# Altium PCB 256ch Headstage PCB_TY.PcbDoc (part 1 of 2)
Units mm, origin at the board's own origin, x right, y up, seen from the top; angles counter-clockwise.
Board outline 24.93 x 25 mm, 4 copper layers (Top Layer, Signal Layer 1, Signal Layer 2, Bottom Layer), stack 0.778 mm thick; 20 components, 288 nets, 788 pads, 303 vias.
Unrouted connection lines stored in the file: 4.
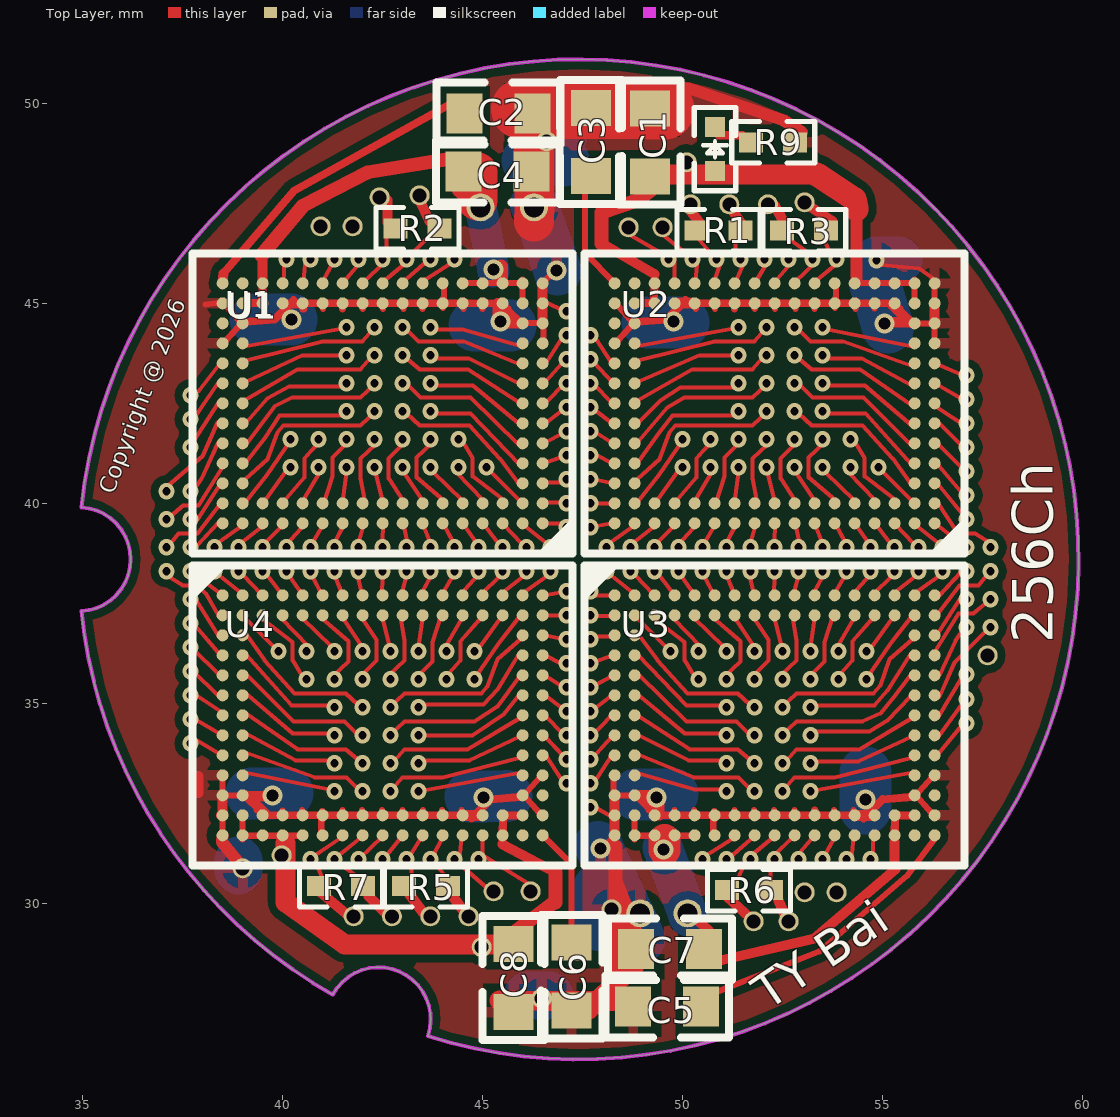
[diagram p0: Top Layer view]
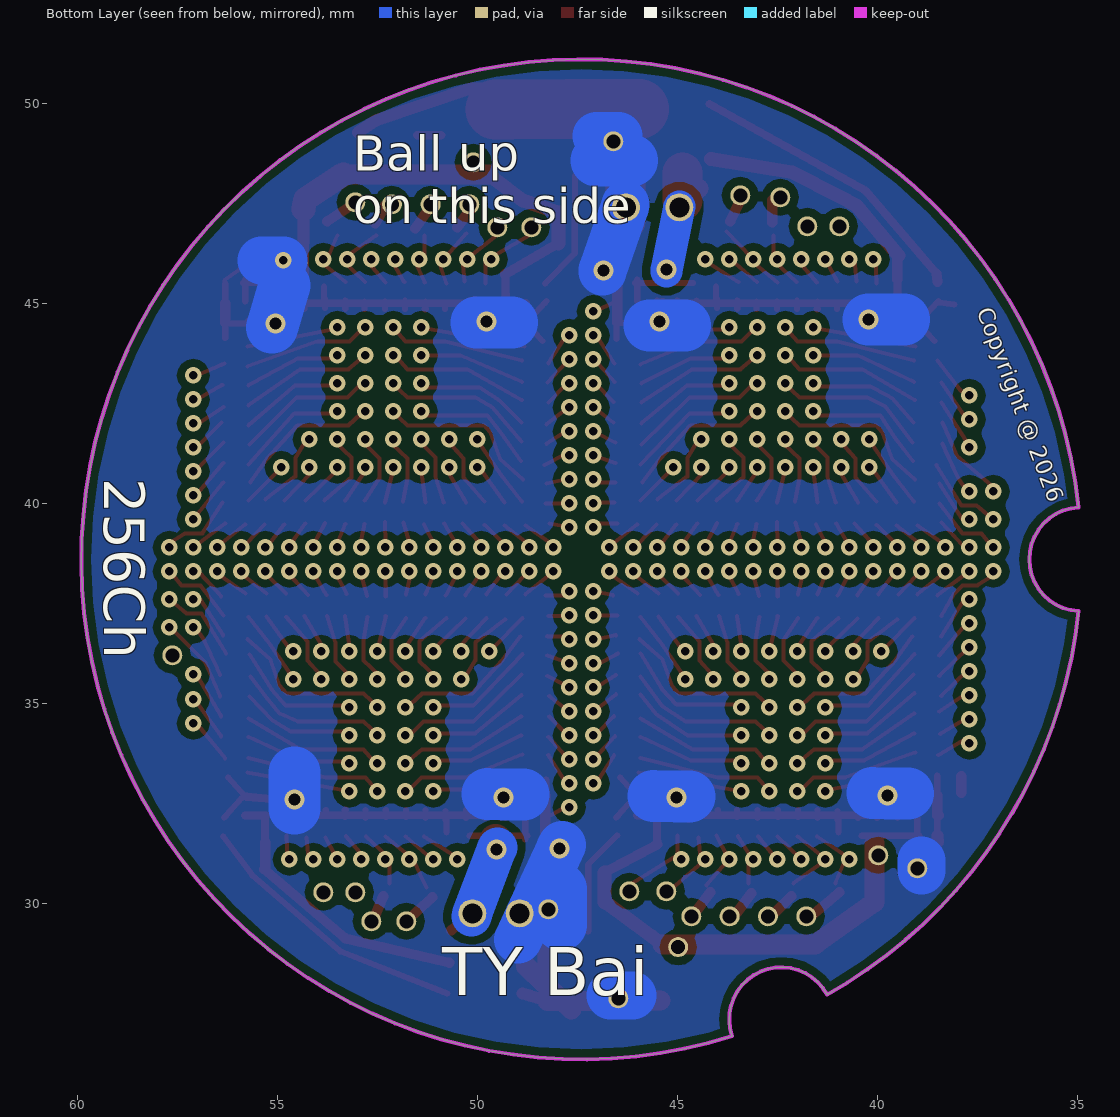
[diagram p1: Bottom Layer view, seen from below]
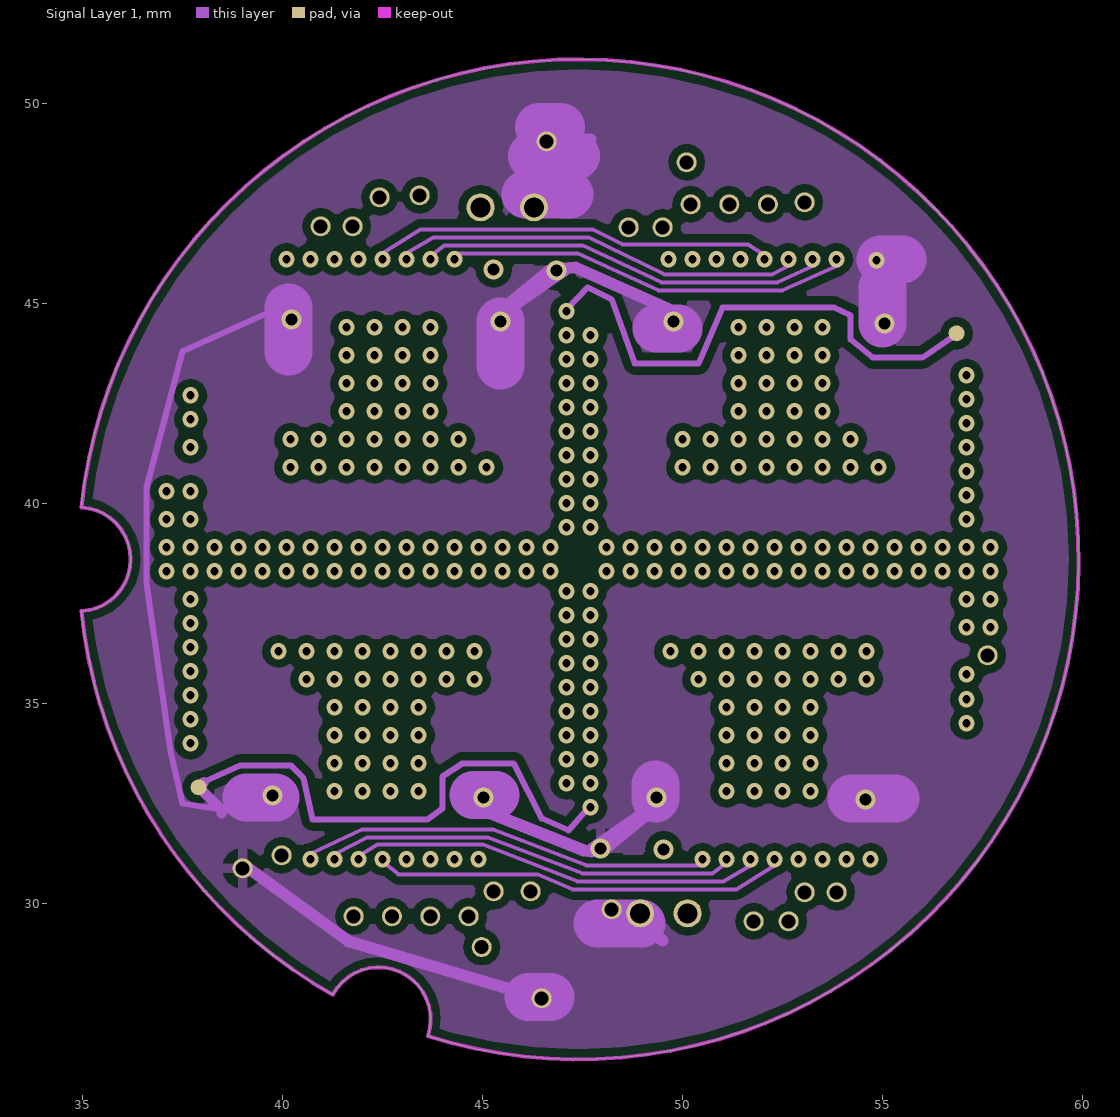
[diagram p2: Signal Layer 1]
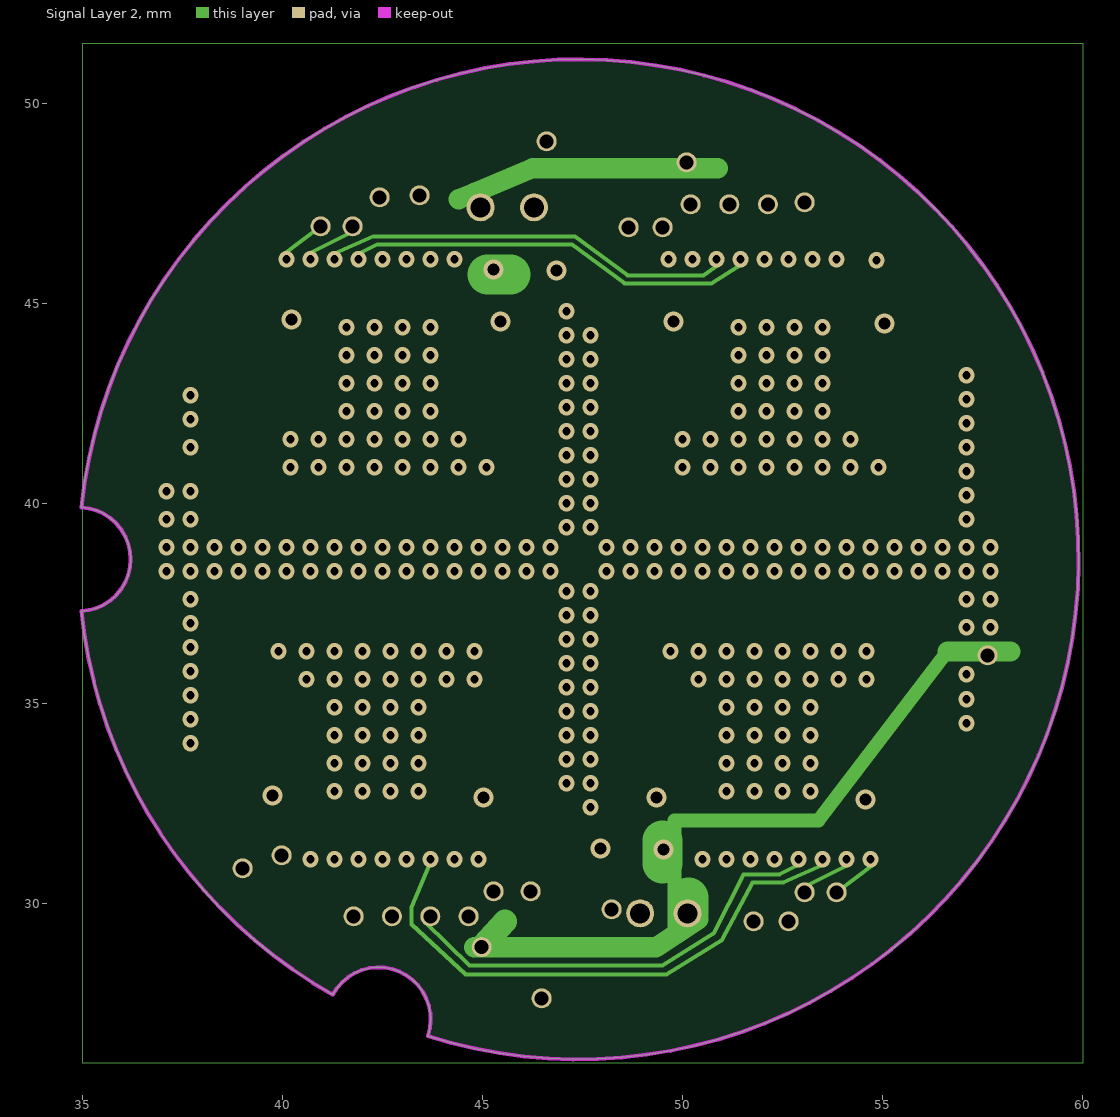
[diagram p3: Signal Layer 2]

## Layer stack, top to bottom
Top Solder: solder mask 0.0102, Solder Resist, Dk 3.5
Top Layer: signal copper 0.0356
Dielectric 1: core 0.254, FR-4, Dk 4.2
Signal Layer 1: signal copper 0.036
Dielectric 3: prepreg 0.127, Dk 4.2
Signal Layer 2: signal copper 0.036
Dielectric 4: core 0.254, Dk 4.2
Bottom Layer: signal copper 0.0356
Bottom Solder: solder mask 0.0102, Solder Resist, Dk 3.5

## Board outline
43.631,26.682 ccw(c47.4,38.6) 34.967,39.897 34.968,39.898 cw(c34.9,38.6) 34.968,37.302 34.968,37.301 ccw(c47.4,38.6) 41.255,27.715 cw(c42.4,27.1)

## Design rules (kind name [scope] priority, off if disabled: settings)
Clearance [All] p1: gap=0.2 ignorepadtopadclearanceinfootprint=FALSE
PolygonConnect [All] p1: connectstyle=Relief reliefconductorwidth=0.254 reliefentries=4 polygonreliefangle="90 Angle" airgapwidth=0.254
RoutingVias [All] p1: holewidth=0.711 width=1.27 viastyle="Through Hole" minholewidth=0.711 minwidth=1.27 maxholewidth=0.711 maxwidth=1.27
SolderMaskExpansion [All] p1: expansion=0.102 istentingtop=FALSE
Width [All] p1: maxlimit=0.254 minlimit=0.102 preferedwidth=0.254
30 further rules are at their usual default settings.

## Classes and differential pairs
component class Sheet1: C1 C2 C3 C4 C5 C6 C7 C8 R1 R2 R3 R5 R6 R7 R9 U2 U3 U4

## Components (designator, comment, footprint, x,y, rotation, side; value= is the part's Value field where it differs from the comment)
C1 "Cap" "SMD RC0805s" 49.179,49.02 r270 top
C2 "Cap" "SMD RC0805s" 45.395,49.743 r0 top
C3 "Cap" "SMD RC0805s" 47.713,49.031 r90 top
C4 "Cap" "SMD RC0805s" 45.375,48.292 r180 top
C5 "Cap" "SMD RC0805s" 49.616,27.424 r180 top
C6 "Cap" "SMD RC0805s" 47.226,28.166 r270 top
C7 "Cap" "SMD RC0805s" 49.684,28.851 r0 top
C8 "Cap" "SMD RC0805s" 45.774,28.134 r90 top
LED1 "LED" "SMD LED0402" 50.809,48.852 r90 top
R1 "Res" "SMD 0402 SC" 50.9,46.825 r180 top
R2 "Res" "SMD 0402 SC" 43.375,46.875 r180 top
R3 "Res" "SMD 0402 SC" 53.041,46.824 r180 top
R5 "Res" "SMD 0402 SC" 43.585,30.426 r0 top
R6 "Res" "SMD 0402 SC" 51.66,30.326 r0 top
R7 "Res" "SMD 0402 SC" 41.46,30.426 r0 top
R9 "Res" "SMD 0402 SC" 52.265,49.023 r180 top
U1 "Intan_RHD2164_BGA" BGA17_13 46.5,39.5 r180 top
U2 "Intan_RHD2164_BGA" BGA17_13 56.3,39.5 r180 top
U3 "Intan_RHD2164_BGA" BGA17_13 48.3,37.7 r0 top (schematic designator U1)
U4 "Intan_RHD2164_BGA" BGA17_13 38.5,37.7 r0 top (schematic designator U2)

## Footprints (in the part's own frame and the unit in brackets; to place one, negate y for a bottom-side part, rotate by r counter-clockwise, add the part's x,y. Pads: shape width x height; smd on the part's side, far side on the other; paste and mask are expansions set on the pad)
BGA17_13 [mm] "BGA, 64-Leads, Body 9x7mm, Pitch 0.5mm"
  round 0.3 smd: A1(0,0) A2(0.5,0) A3(1,0) A4(1.5,0) A5(2,0) A6(2.5,0) A7(3,0) A8(3.5,0) A9(4,0) A10(4.5,0) A11(5,0) A12(5.5,0) A13(6,0) A14(6.5,0) A15(7,0) A16(7.5,0) A17(8,0) B1(0,-0.5) B2(0.5,-0.5) B3(1,-0.5) B4(1.5,-0.5) B5(2,-0.5) B6(2.5,-0.5) B7(3,-0.5) B8(3.5,-0.5) B9(4,-0.5) B10(4.5,-0.5) B11(5,-0.5) B12(5.5,-0.5) B13(6,-0.5) B14(6.5,-0.5) B15(7,-0.5) B16(7.5,-0.5) B17(8,-0.5) C1(0,-1) C2(0.5,-1) C16(7.5,-1) C17(8,-1) D1(0,-1.5) D2(0.5,-1.5) D16(7.5,-1.5) D17(8,-1.5) E1(0,-2) E2(0.5,-2) E16(7.5,-2) E17(8,-2) F1(0,-2.5) F2(0.5,-2.5) F16(7.5,-2.5) F17(8,-2.5) G1(0,-3) G2(0.5,-3) G16(7.5,-3) G17(8,-3) H1(0,-3.5) H2(0.5,-3.5) H16(7.5,-3.5) H17(8,-3.5) J1(0,-4) J2(0.5,-4) J16(7.5,-4) J17(8,-4) K1(0,-4.5) K2(0.5,-4.5) K16(7.5,-4.5) K17(8,-4.5) L1(0,-5) L2(0.5,-5) L16(7.5,-5) L17(8,-5) M1(0,-5.5) M2(0.5,-5.5) M3(1,-5.5) M4(1.5,-5.5) M5(2,-5.5) M6(2.5,-5.5) M7(3,-5.5) M8(3.5,-5.5) M9(4,-5.5) M10(4.5,-5.5) M11(5,-5.5) M12(5.5,-5.5) M13(6,-5.5) M14(6.5,-5.5) M15(7,-5.5) M16(7.5,-5.5) M17(8,-5.5) N1(0,-6) N2(0.5,-6) N3(1,-6) N4(1.5,-6) N5(2,-6) N6(2.5,-6) N7(3,-6) N8(3.5,-6) N9(4,-6) N10(4.5,-6) N11(5,-6) N12(5.5,-6) N13(6,-6) N14(6.5,-6) N15(7,-6) N16(7.5,-6) N17(8,-6)
  silkscreen extent -0.75,-6.75 8.75,0.75, body extent -0.5,-6.5 8.5,0.5, height 3.5
"SMD 0402 SC" [mm]
  rect 0.6x0.5 smd: 1(-0.55,0) 2(0.55,0)
  silkscreen extent -1.04,-0.52 1.04,0.52
"SMD LED0402" [mm]
  rect 0.5x0.5 smd: 1(-0.55,0) 2(0.55,0)
  silkscreen extent -1.04,-0.52 1.04,0.52
"SMD RC0805s" [mm]
  rect 0.9x1 smd: 1(-0.85,0) 2(0.85,0)
  silkscreen extent -1.55,-0.77 1.55,0.77

## Part data
C1 C2 C3 C4 C5 C6 C7 C8: "Capacitor"
R1 R2 R3 R5 R6 R7 R9: "Resistor"
U1 U2 U3 U4: "Intan RHD2164 64CH BGA"

## Free pads (board coordinates)
  round 0.4 smd far side: 0(37.1,38.9) 0(37.1,39.6) 0(37.1,40.3) 0(37.1,38.3) 0(37.7,34) 0(37.7,34.6) 0(37.7,35.2) 0(37.7,35.8) 0(37.7,36.4) 0(37.7,37) 0(37.7,37.6) 0(37.7,38.9) 0(37.7,39.6) 0(37.7,40.3) 0(37.7,41.4) 0(37.7,42.1) 0(37.7,42.7) 0(37.7,38.3) 0(38.3,38.9) 0(38.3,38.3) 0(38.9,38.9) 0(38.9,38.3) 0(39.5,38.9) 0(39.5,38.3) 0(39.9,36.3) 0(40.1,38.9) 0(40.1,38.3) 0(40.2,40.9) 0(40.2,41.6) 0(40.6,35.6) 0(40.6,36.3) 0(40.7,38.9) 0(40.7,38.3) 0(40.9,40.9) 0(40.9,41.6) 0(41.3,38.9) 0(41.3,38.3) 0(41.3,32.8) 0(41.3,33.5) 0(41.3,34.2) 0(41.3,34.9) 0(41.3,35.6) 0(41.3,36.3) 0(41.6,40.9) 0(41.6,41.6) 0(41.6,42.3) 0(41.6,43) 0(41.6,43.7) 0(41.6,44.4) 0(41.9,38.9) 0(41.9,38.3) 0(42,32.8) 0(42,33.5) 0(42,34.2) 0(42,34.9) 0(42,35.6) 0(42,36.3) 0(42.3,40.9) 0(42.3,41.6) 0(42.3,42.3) 0(42.3,43) 0(42.3,43.7) 0(42.3,44.4) 0(42.5,38.9) 0(42.5,38.3) 0(42.7,32.8) 0(42.7,33.5) 0(42.7,34.2) 0(42.7,34.9) 0(42.7,35.6) 0(42.7,36.3) 0(43,40.9) 0(43,41.6) 0(43,42.3) 0(43,43) 0(43,43.7) 0(43,44.4) 0(43.1,38.9) 0(43.1,38.3) 0(43.4,32.8) 0(43.4,33.5) 0(43.4,34.2) 0(43.4,34.9) 0(43.4,35.6) 0(43.4,36.3) 0(43.7,38.9) 0(43.7,38.3) 0(43.7,40.9) 0(43.7,41.6) 0(43.7,42.3) 0(43.7,43) 0(43.7,43.7) 0(43.7,44.4) 0(44.1,35.6) 0(44.1,36.3) 0(44.3,38.9) 0(44.3,38.3) 0(44.4,40.9) 0(44.4,41.6) 0(44.8,35.6) 0(44.8,36.3) 0(44.9,38.9) 0(44.9,38.3) 0(45.1,40.9) 0(45.5,38.9) 0(45.5,38.3) 0(46.1,38.9) 0(46.1,38.3) 0(46.7,38.9) 0(46.7,38.3) 0(47.1,39.4) 0(47.1,40) 0(47.1,40.6) 0(47.1,41.2) 0(47.1,41.8) 0(47.1,42.4) 0(47.1,43) 0(47.1,43.6) 0(47.1,44.2) 0(47.1,44.8) 0(47.1,33) 0(47.1,33.6) 0(47.1,34.2) 0(47.1,34.8) 0(47.1,35.4) 0(47.1,36) 0(47.1,36.6) 0(47.1,37.2) 0(47.1,37.8) 0(47.7,39.4) 0(47.7,43.6) 0(47.7,40) 0(47.7,40.6) 0(47.7,41.2) 0(47.7,41.8) 0(47.7,42.4) 0(47.7,43) 0(47.7,44.2) 0(47.7,32.4) 0(47.7,33) 0(47.7,33.6) 0(47.7,34.2) 0(47.7,34.8) 0(47.7,35.4) 0(47.7,36) 0(47.7,36.6) 0(47.7,37.2) 0(47.7,37.8) 0(48.1,38.9) 0(48.1,38.3) 0(48.7,38.9) 0(48.7,38.3) 0(49.3,38.9) 0(49.3,38.3) 0(49.7,36.3) 0(49.9,38.9) 0(49.9,38.3) 0(50,40.9) 0(50,41.6) 0(50.4,35.6) 0(50.4,36.3) 0(50.5,38.9) 0(50.5,38.3) 0(50.7,40.9) 0(50.7,41.6) 0(51.1,38.9) 0(51.1,32.8) 0(51.1,33.5) 0(51.1,34.2) 0(51.1,34.9) 0(51.1,35.6) 0(51.1,36.3) 0(51.1,38.3) 0(51.4,40.9) 0(51.4,41.6) 0(51.4,42.3) 0(51.4,43) 0(51.4,43.7) 0(51.4,44.4) 0(51.7,38.9) 0(51.7,38.3) 0(51.8,32.8) 0(51.8,33.5) 0(51.8,34.2) 0(51.8,34.9) 0(51.8,35.6) 0(51.8,36.3) 0(52.1,40.9) 0(52.1,41.6) 0(52.1,42.3) 0(52.1,43) 0(52.1,43.7) 0(52.1,44.4) 0(52.3,38.9) 0(52.3,38.3) 0(52.5,32.8) 0(52.5,33.5) 0(52.5,34.2) 0(52.5,34.9) 0(52.5,35.6) 0(52.5,36.3) 0(52.8,40.9) 0(52.8,41.6) 0(52.8,42.3) 0(52.8,43) 0(52.8,43.7) 0(52.8,44.4) 0(52.9,38.9) 0(52.9,38.3) 0(53.2,32.8) 0(53.2,33.5) 0(53.2,34.2) 0(53.2,34.9) 0(53.2,35.6) 0(53.2,36.3) 0(53.5,38.9) 0(53.5,40.9) 0(53.5,41.6) 0(53.5,42.3) 0(53.5,43) 0(53.5,43.7) 0(53.5,44.4) 0(53.5,38.3) 0(53.9,35.6) 0(53.9,36.3) 0(54.1,38.9) 0(54.1,38.3) 0(54.2,40.9) 0(54.2,41.6) 0(54.6,35.6) 0(54.6,36.3) 0(54.7,38.9) 0(54.7,38.3) 0(54.9,40.9) 0(55.3,38.9) 0(55.3,38.3) 0(55.9,38.9) 0(55.9,38.3) 0(56.5,38.9) 0(56.5,38.3) 0(57.1,38.9) 0(57.1,34.5) 0(57.1,35.1) 0(57.1,35.725) 0(57.1,36.9) 0(57.1,37.6) 0(57.1,39.6) 0(57.1,40.2) 0(57.1,40.8) 0(57.1,41.4) 0(57.1,42) 0(57.1,42.6) 0(57.1,43.2) 0(57.1,38.3) 0(57.7,38.9) 0(57.7,36.9) 0(57.7,37.6) 0(57.7,38.3)
  round 0.4 on Mid1: 0(37.9,32.9) 0(40.7,31.1) 0(41.3,31.1) 0(41.9,31.1) 0(42.5,46.1) 0(42.5,31.1) 0(43.1,46.1) 0(43.7,46.1) 0(44.3,46.1) 0(45.025,32.65) 0(45.275,45.85) 0(45.45,44.55) 0(46.85,45.825) 0(47.1,44.8) 0(47.7,32.4) 0(47.95,31.375) 0(49.35,32.65) 0(49.775,44.55) 0(50.5,31.1) 0(51.1,31.1) 0(51.7,31.1) 0(52.05,46.1) 0(52.3,31.1) 0(52.65,46.1) 0(53.25,46.1) 0(53.85,46.1) 0(54.85,46.075) 0(55.05,44.5) 0(56.85,44.25)
  round 0.4 on Mid2: 0(40.1,46.1) 0(40.7,46.1) 0(41.3,46.1) 0(41.9,46.1) 0(43.1,31.1) 0(43.7,31.1) 0(44.3,31.1) 0(44.9,31.1) 0(49.525,31.35) 0(49.65,46.1) 0(50.25,46.1) 0(50.85,46.1) 0(51.45,46.1) 0(52.9,31.1) 0(53.5,31.1) 0(54.1,31.1) 0(54.7,31.1)
  round 0.5 on Mid2: 0(43.692,29.675) 0(44.978,28.906) 0(57.625,36.2)
  round 0.5 on Mid1: 0(46.6,49.05)
  round 0.5 hole 0.35: 6(39,30.875) 6(39.975,31.2) 6(40.95,46.925) 6(41.75,46.925) 6(41.775,29.675) 6(42.425,47.65) 6(42.733,29.675) 6(43.425,47.7) 6(43.692,29.675) 6(44.65,29.675) 6(44.978,28.906) 6(45.275,30.3) 6(46.2,30.3) 6(46.475,27.625) 6(46.6,49.05) 6(48.225,29.85) 6(48.65,46.9) 6(49.5,46.9) 6(50.1,48.525) 6(50.2,47.475) 6(51.167,47.475) 6(51.775,29.55) 6(52.133,47.475) 6(52.65,29.55) 6(53.05,30.275) 6(53.05,47.525) 6(53.85,30.275) 6(57.625,36.2)
  round 0.7 hole 0.5: 6(44.95,47.4) 6(46.285,47.4) 6(48.94,29.75) 6(50.125,29.75)

## Via types
v1: diameter 0.406, hole 0.203, Top Layer to Bottom Layer, 291 vias
v2: diameter 0.5, hole 0.3, Top Layer to Bottom Layer, 12 vias

## Nets (pads, with @x,y where several pads share a name; then routed paths per layer and width w, separated by ;. In a path a pad name is that pad's centre, name@x,y a point inside that pad or via, vN(x,y) a via of type N, cw(c..) or ccw(c..) an arc to the next point about the centre after c; other vN are vias at no path point)
CS3+: pad.0@41.3,31.1 pad.0@51.1,31.1 pad.6@42.733,29.675 R7.2 U3.N8 U4.N8 | length 13.3
  Top Layer w0.102: v1@41.35,31.15 U4.N8@41.988,31.671 ; v1@41.4,31 R7.2@42.1,30.5 ; v1@51.075,31.05 U3.N8@51.788,31.671
  Top Layer w0.254: 42.15,30.175 pad.6@42.55,29.775
  Signal Layer 1 w0.102: pad.0@41.35,31.25 42.125,31.65 45.125,31.65 47.5,30.75 50.75,30.75 pad.0@51.113,31.025
  other v1: 41.3,31.1 51.1,31.1
CS3-: pad.0@40.7,31.1 pad.0@50.5,31.1 pad.6@41.775,29.675 R7.1 U3.N7 U4.N7 | length 13.7
  Top Layer w0.102: v1@40.775,31.175 U4.N7@41.505,31.67 ; v1@40.8,31.1 R7.1@41.05,30.5 ; v1@50.475,31.125 U3.N7@51.33,31.67
  Top Layer w0.254: R7.1@40.95,30.275 pad.6@41.725,29.625
  Signal Layer 1 w0.102: pad.0@40.725,31.25 42,31.85 45.25,31.85 47.6,30.95 pad.0@50.55,30.95
  other v1: 40.7,31.1 50.5,31.1
CS+: pad.0@43.7,46.1 pad.0@53.25,46.1 pad.6@52.133,47.475 R3.2 U1.N8 U2.N8 | length 13.1
  Top Layer w0.102: U1.N8@43.012,45.529 v1@43.725,46.15 ; R3.2@52.525,46.7 v1@53.225,46.2 ; U2.N8@52.812,45.529 v1@53.35,46.05
  Top Layer w0.254: pad.6@52.3,47.45 R3.2@52.55,47
  Signal Layer 1 w0.102: pad.0@43.687,46.175 44.05,46.45 47.5,46.45 49.475,45.525 52.375,45.525 pad.0@53.3,45.95
  other v1: 43.7,46.1 53.25,46.1
CS-: pad.0@44.3,46.1 pad.0@53.85,46.1 pad.6@53.05,47.525 R3.1 U1.N7 U2.N7 | length 13.2
  Top Layer w0.102: U1.N7@43.47,45.53 v1@44.325,46.075 ; U2.N7@53.295,45.53 v1@53.9,46.025 ; R3.1@53.5,46.7 v1@53.75,46.1
  Top Layer w0.254: pad.6@53.1,47.475 R3.1@53.75,47.05
  Signal Layer 1 w0.102: pad.0@44.25,46.25 47.375,46.25 49.4,45.325 52.5,45.325 pad.0@53.9,45.95
  other v1: 44.3,46.1 53.85,46.1
ELEC_TEST1: U1.L17
ELEC_TEST2: U2.L17
ELEC_TEST3: U3.L17
ELEC_TEST4: U4.L17
GND: C1.1 C2.2 C3.2 C4.1 C5.2 C6.2 C7.1 C8.1 pad.0@45.025,32.65 pad.0@45.45,44.55 pad.0@46.6,49.05 pad.0@46.85,45.825 pad.0@47.95,31.375 pad.0@49.35,32.65 pad.0@49.775,44.55 pad.0@54.85,46.075 pad.0@55.05,44.5 pad.6@39,30.875 pad.6@46.6,49.05 pad.6@46.285,47.4 pad.6@46.475,27.625 pad.6@48.94,29.75 pad.6@48.225,29.85 R9.1 U1.K1 U1.K17 U1.L1 U1.L2 U1.L16 U1.M3 U1.M4 U1.M5 U1.M6 U1.M7 U1.M8 U1.M9 U1.M10 U1.M11 U1.M12 U1.M13 U1.M14 U1.M17 U1.N1 U1.N6 U2.K1 U2.K17 U2.L1 U2.L2 U2.L16 U2.M3 U2.M4 U2.M5 U2.M6 U2.M7 U2.M8 U2.M9 U2.M10 U2.M11 U2.M12 U2.M13 U2.M14 U2.M17 U2.N1 U2.N6 U3.K1 U3.K17 U3.L1 U3.L2 U3.L16 U3.M3 U3.M4 U3.M5 U3.M6 U3.M7 U3.M8 U3.M9 U3.M10 U3.M11 U3.M12 U3.M13 U3.M14 U3.M17 U3.N1 U3.N6 U4.K1 U4.K17 U4.L1 U4.L2 U4.L16 U4.M3 U4.M4 U4.M5 U4.M6 U4.M7 U4.M8 U4.M9 U4.M10 U4.M11 U4.M12 U4.M13 U4.M14 U4.M17 U4.N1 U4.N6 | length 155.2
  Top Layer w0.102: v1@54.849,45.97 55.9,45.875 U2.N1@56.325,45.575
  Top Layer w0.152: 38.075,44.975 U1.M17@38.45,45.019 ; U4.L1@38.447,32.696 38.5,32.696 39,32.696 U4.L2@39.058,32.696 ; U1.M17@38.474,45.057 38.514,45.012 U1.L16@38.899,44.582 ; U4.L1@38.5,32.7 U4.K1@38.5,33.2 ; U1.K17@38.574,44.057 38.983,44.515 U1.L16@38.999,44.532 ; U4.M3@39.492,32.131 39.492,32.31 39.492,32.336 39.492,32.386 ; U4.M4@40,32.132 U4.M4@40,32.2 U4.M4@40,32.325 ; U4.M5@40.483,32.131 40.483,32.2 U4.M5@40.483,32.336 ; U1.M13@40.529,44.864 40.529,44.975 40.529,45 U1.M13@40.529,45.019 ; U4.N6@40.966,31.775 U4.M6@40.966,32.08 ; U4.M6@40.991,32.081 40.991,32.2 U4.M6@40.991,32.311 ; U1.M12@41.012,44.864 U1.M12@41.012,44.968 ; U1.M11@41.495,44.864 41.495,45 U1.M11@41.495,45.043 ; U4.M7@41.499,32.131 41.499,32.2 U4.M7@41.499,32.336 ; U4.M8@41.982,32.156 41.982,32.2 U4.M8@41.982,32.336 ; U1.M10@42.003,44.864 42.003,45 U1.M10@42.003,45.068 ; U4.M9@42.489,32.157 42.489,32.2 U4.M9@42.489,32.336 ; U1.M9@42.511,44.864 42.511,45 U1.M9@42.511,45.043 ; U4.M10@42.997,32.132 42.997,32.2 U4.M10@42.997,32.336 ; U1.M8@43.018,44.864 43.018,45 U1.M8@43.018,45.044 ; U1.M7@43.501,44.864 43.501,45 U1.M7@43.501,45.069 ; U4.M11@43.505,32.157 43.505,32.2 U4.M11@43.505,32.336 ; U4.M12@43.988,32.232 U4.M12@43.988,32.336 ; U1.M6@44.009,44.889 44.009,45 U1.M6@44.009,45.119 ; U1.M6@44.034,45.12 U1.N6@44.034,45.425 ; U4.M13@44.471,32.181 44.471,32.2 44.471,32.225 U4.M13@44.471,32.336 ; U1.M5@44.517,44.864 44.517,45 U1.M5@44.517,45.069 ; U4.M13@44.597,32.131 44.731,32.131 U4.M14@44.902,32.131 ; U1.M4@45,44.864 U1.M4@45,45 U1.M4@45,45.068 ; 45.508,44.814 45.508,44.864 45.508,44.89 U1.M3@45.508,45.069 ; U1.L2@45.942,44.504 46,44.504 46.5,44.504 U1.L1@46.553,44.504 ; U4.L16@46.001,32.668 46.017,32.685 U4.K17@46.426,33.143 ; U4.L16@46.101,32.618 46.486,32.188 U4.M17@46.526,32.143 ; U1.K1@46.524,44.105 U1.L1@46.524,44.41 ; U1.N1@46.549,45.557 46.821,45.852 v2@46.849,45.882 ; v2@47.951,31.318 47.979,31.348 U3.N1@48.251,31.643 ; U3.L1@48.247,32.696 48.3,32.696 48.8,32.696 U3.L2@48.858,32.696 ; U2.M17@48.274,45.057 48.314,45.012 U2.L16@48.699,44.582 ; U3.L1@48.276,32.79 U3.K1@48.276,33.095 ; U2.K17@48.374,44.057 48.783,44.515 U2.L16@48.799,44.532 ; U3.M3@49.292,32.131 49.292,32.31 49.292,32.336 49.292,32.386 ; U3.M4@49.8,32.132 U3.M4@49.8,32.2 U3.M4@49.8,32.336 ; U2.M14@49.898,45.069 50.069,45.069 U2.M13@50.203,45.069 ; U3.M5@50.283,32.131 50.283,32.2 U3.M5@50.283,32.336 ; U2.M13@50.329,44.864 50.329,44.975 50.329,45 U2.M13@50.329,45.019 ; U3.N6@50.766,31.775 U3.M6@50.766,32.08 ; U3.M6@50.791,32.081 50.791,32.2 U3.M6@50.791,32.311 ; U2.M12@50.812,44.864 U2.M12@50.812,44.968 ; U2.M11@51.295,44.864 51.295,45 U2.M11@51.295,45.043 ; U3.M7@51.299,32.131 51.299,32.2 U3.M7@51.299,32.336 ; U3.M8@51.782,32.156 51.782,32.2 U3.M8@51.782,32.336 ; U2.M10@51.803,44.864 51.803,45 U2.M10@51.803,45.068 ; U3.M9@52.289,32.157 52.289,32.2 U3.M9@52.289,32.336 ; U2.M9@52.311,44.864 52.311,45 U2.M9@52.311,45.043 ; U3.M10@52.797,32.132 52.797,32.2 U3.M10@52.797,32.336 ; U2.M8@52.818,44.864 52.818,45 U2.M8@52.818,45.044 ; U2.M7@53.301,44.864 53.301,45 U2.M7@53.301,45.069 ; U3.M11@53.305,32.157 53.305,32.2 U3.M11@53.305,32.336 ; U3.M12@53.788,32.232 U3.M12@53.788,32.336 ; U2.M6@53.809,44.889 53.809,45 U2.M6@53.809,45.119 ; U2.M6@53.834,45.12 U2.N6@53.834,45.425 ; U3.M13@54.271,32.181 54.271,32.2 54.271,32.225 U3.M13@54.271,32.336 ; U2.M5@54.317,44.864 54.317,45 U2.M5@54.317,45.069 ; U3.M13@54.397,32.131 54.531,32.131 U3.M14@54.702,32.131 ; U2.M4@54.8,44.875 U2.M4@54.8,45 U2.M4@54.8,45.068 ; 55.308,44.814 55.308,44.864 55.308,44.89 U2.M3@55.308,45.069 ; U3.L16@55.801,32.668 55.817,32.685 U3.K17@56.226,33.143 ; U2.L2@55.8,44.5 U2.L1@56.3,44.5 ; U3.L16@55.901,32.618 56.286,32.188 U3.M17@56.326,32.143 ; U2.K1@56.3,44.129 U2.L1@56.3,44.5 ; 56.3,45.125 U2.N1@56.3,45.5 ; U2.L1@56.324,44.48 56.3,44.504 U2.L1@56.3,44.5
  Top Layer w0.18: 39.364,32.336 39.465,32.336 U4.M3@39.492,32.336 ; U4.M3@39.528,32.2 U4.M4@40,32.2 40.483,32.2 U4.M5@40.5,32.2 40.991,32.2 U4.M6@41,32.2 41.499,32.2 U4.M7@41.5,32.2 41.982,32.2 U4.M8@42,32.2 42.489,32.2 U4.M9@42.5,32.2 42.997,32.2 U4.M10@43,32.2 U4.M11@43.5,32.2 43.505,32.2 U4.M12@44,32.2 44.471,32.2 U4.M13@44.5,32.2 44.8,32.2 U4.M14@44.935,32.2 ; U1.M14@40,45 U1.M13@40.399,45 ; U1.M13@40.429,45 U1.M13@40.5,45 40.529,45 U1.M12@41,45 U1.M11@41.394,45 ; U1.M13@40.5,44.864 U1.M13@40.529,44.864 ; U1.M11@41.399,45 41.495,45 U1.M11@41.5,45 U1.M10@42,45 42.003,45 U1.M9@42.5,45 42.511,45 U1.M8@43,45 43.018,45 U1.M7@43.5,45 43.501,45 U1.M6@44,45 44.009,45 U1.M5@44.5,45 44.517,45 U1.M4@45,45 45.274,45 ; U1.M11@41.495,44.864 U1.M11@41.5,44.864 ; 45.375,44.864 45.508,44.864 45.535,44.864 45.636,44.864 ; 49.164,32.336 49.265,32.336 49.292,32.336 49.425,32.336 ; U3.M3@49.425,32.2 U3.M4@49.8,32.2 50.283,32.2 U3.M5@50.3,32.2 50.791,32.2 U3.M6@50.8,32.2 51.299,32.2 U3.M7@51.3,32.2 51.782,32.2 U3.M8@51.8,32.2 52.289,32.2 U3.M9@52.3,32.2 52.797,32.2 U3.M10@52.8,32.2 U3.M11@53.3,32.2 ; U2.M14@49.8,45 50,45 U2.M13@50.3,45 50.329,45 U2.M12@50.8,45 U2.M11@51.194,45 ; U2.M11@51.199,45 51.295,45 U2.M11@51.3,45 U2.M10@51.8,45 51.803,45 U2.M9@52.3,45 52.311,45 U2.M8@52.8,45 52.818,45 U2.M7@53.3,45 53.301,45 U2.M6@53.8,45 53.809,45 U2.M5@54.3,45 54.317,45 U2.M4@54.8,45 U2.M3@55.207,45 ; U2.M11@51.295,44.864 U2.M11@51.3,44.864 ; U3.M11@53.3,32.336 U3.M11@53.305,32.336 ; U3.M11@53.305,32.2 U3.M12@53.8,32.2 54.271,32.2 U3.M13@54.3,32.2 54.6,32.2 U3.M14@54.699,32.2 ; U2.M3@55.308,44.864 55.335,44.864 55.436,44.864
  Top Layer w0.203: U1.L16@39.031,44.537 39.8,44.6 40.013,44.812 40.1,44.9 40.175,44.975 ; U1.M14@40.125,44.975 40.175,44.975 ; 40.269,45.069 40.275,45.075 ; U1.M13@40.55,44.975 40.529,44.975 40.175,44.975 ; U4.M13@44.45,32.225 44.471,32.225 44.825,32.225 ; 44.725,32.125 44.731,32.131 44.8,32.2 44.825,32.225 ; U4.M14@44.875,32.225 44.825,32.225 ; U4.L16@45.969,32.663 45.2,32.6 45.138,32.537 44.9,32.3 44.825,32.225 ; U2.L16@48.831,44.537 49.6,44.6 49.9,44.9 49.975,44.975 ; U2.M14@49.925,44.975 49.975,44.975 ; 50.075,45.075 50.069,45.069 50,45 49.975,44.975 ; U2.M13@50.35,44.975 50.329,44.975 49.975,44.975 ; U3.M13@54.25,32.225 54.271,32.225 54.625,32.225 ; 54.525,32.125 54.531,32.131 54.6,32.2 54.625,32.225 ; U3.M14@54.675,32.225 54.625,32.225 ; U3.L16@55.769,32.663 55,32.6 54.788,32.388 54.7,32.3 54.625,32.225
  Top Layer w0.254: U4.L2@39.085,32.696 39.465,32.336 39.492,32.31 39.551,32.254 U4.M3@39.562,32.244 ; 39.15,32.675 v2@39.85,32.675 ; v2@45.375,44.5 45.375,44.864 U1.M3@45.375,45 ; v2@45.4,44.5 U1.L2@45.9,44.5 ; U1.M3@45.438,44.956 45.449,44.946 45.508,44.89 45.535,44.864 45.647,44.758 U1.L2@45.915,44.504 ; C4.1@45.925,47.925 46.291,47.473 46.324,47.432 pad.6@46.35,47.4 ; 48.375,30.55 48.729,29.666 C7.1@48.875,29.3 ; 48.4,30.15 48.462,29.911 48.53,29.645 C7.1@48.625,29.275 ; U3.L2@48.885,32.696 49.153,32.442 49.265,32.336 49.292,32.31 49.351,32.254 U3.M3@49.362,32.244 ; U3.L2@48.9,32.7 v2@49.4,32.7 ; U3.M3@49.425,32.2 49.425,32.336 v2@49.425,32.7 ; v2@54.95,44.525 55.65,44.525 ; U2.M3@55.238,44.956 55.249,44.946 55.308,44.89 55.335,44.864 U2.L2@55.715,44.504
  Top Layer w0.3: U4.N1@38.5,31.7 38.483,31.529 pad.6@38.975,30.925 ; 46.025,50.375 46.245,50.375 47.713,50.375 49.179,50.375 50.15,50.375 52.525,49.575 52.981,49.276 ; 48.25,27.559 48.684,27.692 C5.2@48.875,27.75
  Top Layer w0.35: 48.325,27.925 48.325,27.995 48.325,28.851 48.325,29.85 48.325,31.375 48.325,31.425
  Top Layer w0.5: C8.1@45.425,27.565 45.774,27.564 46.475,27.563 47.227,27.561 47.87,27.56 48.25,27.559
  Top Layer w0.508: C4.1@46.025,48.775 46.297,49.035 46.463,49.193 46.624,49.347 47.15,49.85 ; C6.2@47.65,27.35 47.87,27.56 48.27,27.942 48.325,27.995 C7.1@48.775,28.425
  Top Layer w1: 46.29,47.048 46.291,47.4 46.291,47.473 46.294,48.292 46.297,49.035 46.297,49.051 46.299,49.742 46.299,49.855 C2.2@46.3,50
  Top Layer w1.5: C2.2@45.957,49.855 46.246,49.855 46.299,49.855 46.601,49.854 47.713,49.853 49.179,49.851 C1.1@49.55,49.85
  Signal Layer 1 w0.15: 38.74,32.3 37.5,32.5 37.2,33.8 36.6,38 36.6,40.4 37.5,43.8 39.75,44.814
  Signal Layer 1 w0.3: pad.6@39.075,30.925 41.65,29.05 46.359,27.652 pad.6@46.45,27.625 ; 44.625,32.475 44.911,32.362 47.525,31.325 v2@47.725,31.3 ; pad.0@45.425,44.7 46.915,45.731 v2@47.05,45.825 ; 45.655,44.992 pad.0@46.678,45.825 ; 46.2,49.1 47.7,49.1 ; pad.0@47,45.875 47.325,45.9 49.867,44.753 50.15,44.625 ; pad.0@47.75,31.375 47.885,31.469 pad.0@49.375,32.5 ; 47.925,29.85 48.167,29.731 48.636,29.5 48.782,29.428 49.5,29.075 ; v2@48.155,31.438 49.178,32.271 ; pad.0@54.925,44.625 54.925,46.075 pad.0@54.925,46.1
  Signal Layer 1 w0.508: 45.425,43.525 pad.0@45.425,44.55
  Signal Layer 1 w1.2: 39.1,32.65 v2@39.825,32.65 ; 40.15,43.8 40.15,44.9 ; 44.774,32.707 45.324,32.707 ; 45.45,43.45 v2(45.45,44.55) ; 46.071,47.714 47.171,47.714 ; 46.152,27.652 46.359,27.652 pad.6@46.702,27.652 ; 46.237,48.687 47.337,48.687 ; 46.413,49.413 46.963,49.413 ; 47.875,29.5 48.636,29.5 pad.6@48.975,29.5 ; pad.0@49.325,32.625 49.325,32.975 ; 49.35,44.375 v2@49.9,44.375 ; 54.225,32.625 55.325,32.625 ; pad.0@54.95,46.1 55.5,46.1 ; pad.0@55,44.5 55,45.4
  Bottom Layer w1.2: pad.6@38.9,30.825 38.9,30.875 pad.6@38.9,31.075 ; 46.12,27.691 pad.6@46.67,27.691 ; pad.6@46.29,47.475 46.313,47.41 46.864,45.83 v2@46.875,45.8 ; pad.6@46.473,49.177 47.023,49.177 ; v2@47.888,31.452 47.928,31.365 48.558,30.004 48.723,29.649 48.977,29.1 ; v1(54.85,46.075) 55.4,46.075
  Bottom Layer w1.3: 39.226,32.75 39.75,32.751 40.125,32.752 ; 39.326,44.598 v2(40.225,44.6) ; 44.7,32.675 45.025,32.676 45.599,32.677 ; 44.801,44.448 45.45,44.449 45.7,44.45 ; 46.126,48.573 46.601,48.574 47.025,48.575 ; 47.902,30.357 47.903,29.849 47.904,29.458 ; 48.85,32.725 49.35,32.726 49.749,32.727 ; 49.126,44.523 49.775,44.524 50.025,44.525 ; 54.573,33.274 v2(54.575,32.6) v2@54.575,32.375 ; 54.825,45.45 55.096,44.513 v2@55.129,44.399
  other v2: 47.95,31.375 45.025,32.65 49.35,32.65 39.75,32.7 55.05,44.5 49.775,44.55 46.85,45.825
IN0: pad.0@43.7,44.4 U1.K2 | length 2.1
  Top Layer w0.102: v1@43.85,44.35 44.5,44.35 U1.K2@45.9,43.95
  other v1: 43.7,44.4
IN1: pad.0@47.1,44.2 U1.J1 | length 0.8
  Top Layer w0.102: U1.J1@46.574,43.495 v1@47.025,44.2
  other v1: 47.1,44.2
IN2: pad.0@43,44.4 U1.J2 | length 3
  Top Layer w0.102: v1@43.125,44.325 43.4,44.05 44.525,44.05 U1.J2@45.925,43.475
  other v1: 43,44.4
IN3: pad.0@47.1,43.6 U1.H1 | length 0.8
  Top Layer w0.102: U1.H1@46.574,43.038 v1@47.1,43.625
  other v1: 47.1,43.6
IN4: pad.0@43.7,43.7 U1.H2 | length 2.2
  Top Layer w0.102: v1@43.825,43.625 44.65,43.625 U1.H2@45.9,43
  other v1: 43.7,43.7
IN5: pad.0@47.1,43 U1.G1 | length 0.7
  Top Layer w0.102: U1.G1@46.599,42.53 v1@47.05,43
  other v1: 47.1,43
IN6: pad.0@43,43.7 U1.G2 | length 3.1
  Top Layer w0.102: v1@43.125,43.6 43.425,43.35 44.625,43.35 U1.G2@45.9,42.525
  other v1: 43,43.7
IN7: pad.0@47.1,42.4 U1.F1 | length 0.5
  Top Layer w0.102: U1.F1@46.599,42.022 v1@47.03,42.353
  other v1: 47.1,42.4
IN8: pad.0@43.7,43 U1.F2 | length 2.5
  Top Layer w0.102: v1@43.775,42.95 44.75,42.95 U1.F2@45.898,41.999
  other v1: 43.7,43
IN9: pad.0@47.1,41.8 U1.E1 | length 0.5
  Top Layer w0.102: U1.E1@46.549,41.515 v1@47.031,41.767
  other v1: 47.1,41.8
IN10: pad.0@43,43 U1.E2 | length 3.4
  Top Layer w0.102: v1@43.15,42.95 43.45,42.65 44.7,42.65 U1.E2@45.9,41.475
  other v1: 43,43
IN11: pad.0@47.1,41.2 U1.D1 | length 0.5
  Top Layer w0.102: U1.D1@46.549,41.006 v1@47.055,41.184
  other v1: 47.1,41.2
IN12: pad.0@43.7,42.3 U1.D2 | length 2.6
  Top Layer w0.102: v1@43.825,42.25 44.7,42.25 U1.D2@45.923,40.974
  other v1: 43.7,42.3
IN13: pad.0@47.1,40.6 U1.C1 | length 0.5
  Top Layer w0.102: U1.C1@46.549,40.523 v1@47.056,40.526
  other v1: 47.1,40.6
IN14: pad.0@43,42.3 U1.C2 | length 3.5
  Top Layer w0.102: v1@43.125,42.225 43.425,41.95 44.675,41.95 45.425,41.125 U1.C2@45.875,40.525
  other v1: 43,42.3
IN15: pad.0@47.1,40 U1.B1 | length 0.5
  Top Layer w0.102: U1.B1@46.575,40.015 v1@47.081,40.017
  other v1: 47.1,40
IN16: pad.0@47.1,39.4 U1.A1 | length 0.5
  Top Layer w0.102: U1.A1@46.5,39.5 v1@47,39.5
  other v1: 47.1,39.4
IN17: pad.0@45.1,40.9 U1.B2 | length 1
  Top Layer w0.102: v1@45.2,40.8 U1.B2@45.923,40.074
  other v1: 45.1,40.9
IN18: pad.0@46.7,38.9 U1.A2 | length 0.8
  Top Layer w0.102: U1.A2@46,39.475 v1@46.625,38.975
  other v1: 46.7,38.9
IN19: pad.0@44.4,41.6 U1.B3 | length 1.8
  Top Layer w0.102: v1@44.525,41.5 44.75,41.125 44.75,40.675 U1.B3@45.5,40.1
  other v1: 44.4,41.6
IN20: pad.0@46.1,38.9 U1.A3 | length 0.7
  Top Layer w0.102: U1.A3@45.525,39.475 v1@45.975,39
  other v1: 46.1,38.9
IN21: pad.0@44.4,40.9 U1.B4 | length 1
  Top Layer w0.102: v1@44.35,40.775 U1.B4@45.023,40.074
  other v1: 44.4,40.9
IN22: pad.0@45.5,38.9 U1.A4 | length 0.8
  Top Layer w0.102: U1.A4@45.025,39.475 v1@45.5,38.85
  other v1: 45.5,38.9
IN23: pad.0@43.7,40.9 U1.B5 | length 1
  Top Layer w0.102: v1@43.775,40.775 U1.B5@44.5,40.075
  other v1: 43.7,40.9
IN24: pad.0@44.9,38.9 U1.A5 | length 0.6
  Top Layer w0.102: U1.A5@44.5,39.5 v1@44.85,39
  other v1: 44.9,38.9
IN25: pad.0@43.7,41.6 U1.B6 | length 1.9
  Top Layer w0.102: v1@43.75,41.525 43.35,41.15 43.35,40.65 U1.B6@44.023,40.074
  other v1: 43.7,41.6
IN26: pad.0@44.3,38.9 U1.A6 | length 0.6
  Top Layer w0.102: U1.A6@44.009,39.507 v1@44.275,39
  other v1: 44.3,38.9
IN27: pad.0@43,40.9 U1.B7 | length 0.9
  Top Layer w0.102: v1@43.025,40.775 U1.B7@43.502,40.066
  other v1: 43,40.9
IN28: pad.0@43.7,38.9 U1.A7 | length 0.5
  Top Layer w0.102: U1.A7@43.501,39.482 v1@43.7,39
  other v1: 43.7,38.9
IN29: pad.0@43,41.6 U1.B8 | length 1.7
  Top Layer w0.102: v1@43,41.475 42.65,41.125 42.65,40.625 U1.B8@43.019,40.065
  other v1: 43,41.6
IN30: pad.0@43.1,38.9 U1.A8 | length 0.5
  Top Layer w0.102: U1.A8@43.018,39.482 v1@43.125,39
  other v1: 43.1,38.9
IN31: pad.0@42.3,40.9 U1.B9 | length 0.8
  Top Layer w0.102: v1@42.325,40.775 U1.B9@42.512,40.015
  other v1: 42.3,40.9
IN32: pad.0@42.5,38.9 U1.A9 | length 0.6
  Top Layer w0.102: v1@42.5,38.975 U1.A9@42.511,39.532
  other v1: 42.5,38.9
IN33: pad.0@41.9,38.9 U1.A10 | length 0.6
  Top Layer w0.102: v1@41.875,38.925 U1.A10@42.042,39.517
  other v1: 41.9,38.9
IN34: pad.0@42.3,41.6 U1.B10 | length 1.6
  Top Layer w0.102: U1.B10@42.054,40.041 41.95,40.625 41.95,41.125 v1@42.325,41.475
  other v1: 42.3,41.6
IN35: pad.0@41.3,38.9 U1.A11 | length 0.6
  Top Layer w0.102: v1@41.275,38.975 U1.A11@41.534,39.468
  other v1: 41.3,38.9
IN36: pad.0@41.6,40.9 U1.B11 | length 0.8
  Top Layer w0.102: U1.B11@41.495,40.016 v1@41.6,40.775
  other v1: 41.6,40.9
IN37: pad.0@40.7,38.9 U1.A12 | length 0.6
  Top Layer w0.102: v1@40.725,38.975 U1.A12@41.026,39.493
  other v1: 40.7,38.9
IN38: pad.0@41.6,41.6 U1.B12 | length 1.7
  Top Layer w0.102: U1.B12@41.038,40.016 41.25,40.675 41.25,41.15 v1@41.6,41.5
  other v1: 41.6,41.6
IN39: pad.0@40.1,38.9 U1.A13 | length 0.7
  Top Layer w0.102: v1@40.1,38.975 U1.A13@40.569,39.493
  other v1: 40.1,38.9
IN40: pad.0@40.9,40.9 U1.B13 | length 0.9
  Top Layer w0.102: U1.B13@40.48,40.015 v1@40.925,40.775
  other v1: 40.9,40.9
IN41: pad.0@39.5,38.9 U1.A14 | length 0.6
  Top Layer w0.102: v1@39.575,39.025 U1.A14@40.013,39.46
  other v1: 39.5,38.9
IN42: pad.0@40.9,41.6 U1.B14 | length 1.8
  Top Layer w0.102: U1.B14@40.022,40.041 40.55,40.65 40.55,41.125 v1@40.928,41.548
  other v1: 40.9,41.6
IN43: pad.0@38.9,38.9 U1.A15 | length 0.7
  Top Layer w0.102: v1@38.95,39 U1.A15@39.525,39.45
  other v1: 38.9,38.9
IN44: pad.0@40.2,40.9 U1.B15 | length 1.1
  Top Layer w0.102: U1.B15@39.525,40.025 v1@40.15,40.9
  other v1: 40.2,40.9
IN45: pad.0@38.3,38.9 U1.A16 | length 0.7
  Top Layer w0.102: v1@38.4,39.025 U1.A16@39,39.45
  other v1: 38.3,38.9
IN46: pad.0@40.2,41.6 U1.B16 | length 1.9
  Top Layer w0.102: U1.B16@39.081,40.04 39.6,40.7 v1@40.2,41.575
  other v1: 40.2,41.6
IN47: pad.0@37.7,38.9 U1.A17 | length 0.8
  Top Layer w0.102: v1@37.86,38.94 U1.A17@38.398,39.523
  other v1: 37.7,38.9
IN48: pad.0@37.1,38.9 U1.B17 | length 1.7
  Top Layer w0.102: v1@37.2,39 37.4,39.25 37.875,39.25 U1.B17@38.45,40
  other v1: 37.1,38.9
IN49: pad.0@42.3,42.3 U1.C16 | length 4.2
  Top Layer w0.102: U1.C16@39.056,40.598 39.625,41.1 39.875,41.775 40.025,41.95 41.95,41.95 v1@42.35,42.325
  other v1: 42.3,42.3
IN50: pad.0@37.7,39.6 U1.C17 | length 1.1
  Top Layer w0.102: v1@37.875,39.6 U1.C17@38.448,40.498
  other v1: 37.7,39.6
IN51: pad.0@41.6,42.3 U1.D16 | length 3
  Top Layer w0.102: U1.D16@39.107,41.055 39.55,41.625 39.925,42.2 v1@41.55,42.2
  other v1: 41.6,42.3
IN52: pad.0@37.1,39.6 U1.D17 | length 2
  Top Layer w0.102: v1@37.185,39.665 37.525,39.95 37.9,39.95 U1.D17@38.523,40.956
  other v1: 37.1,39.6
IN53: pad.0@42.3,43 U1.E16 | length 3.8
  Top Layer w0.102: U1.E16@39.125,41.525 39.8,42.425 40.25,42.65 41.95,42.65 v1@42.325,43
  other v1: 42.3,43
IN54: pad.0@37.7,40.3 U1.E17 | length 1.3
  Top Layer w0.102: v1@37.76,40.315 37.975,40.625 U1.E17@38.373,41.489
  other v1: 37.7,40.3
IN55: pad.0@41.6,43 U1.F16 | length 2.9
  Top Layer w0.102: U1.F16@39.1,42.025 39.625,42.625 40.175,42.925 v1@41.675,42.925
  other v1: 41.6,43
IN56: pad.0@37.1,40.3 U1.F17 | length 2
  Top Layer w0.102: v1@37.15,40.45 38,41.175 U1.F17@38.373,42.023
  other v1: 37.1,40.3
IN57: pad.0@42.3,43.7 U1.G16 | length 3.6
  Top Layer w0.102: U1.G16@39.057,42.58 40.375,43.35 41.95,43.35 v1@42.275,43.725
  other v1: 42.3,43.7
IN58: pad.0@37.7,41.4 U1.G17 | length 1.2
  Top Layer w0.102: v1@37.76,41.54 U1.G17@38.398,42.523
  other v1: 37.7,41.4
IN59: pad.0@41.6,43.7 U1.H16 | length 2.6
  Top Layer w0.102: U1.H16@39.082,43.038 40.5,43.7 v1@41.575,43.7
  other v1: 41.6,43.7
IN60: pad.0@37.7,42.1 U1.H17 | length 1
  Top Layer w0.102: v1@37.85,42.225 U1.H17@38.398,43.023
  other v1: 37.7,42.1
IN61: pad.0@42.3,44.4 U1.J16 | length 3.5
  Top Layer w0.102: U1.J16@39.082,43.57 41,44.05 42,44.05 v1@42.325,44.425
  other v1: 42.3,44.4
IN62: pad.0@37.7,42.7 U1.J17 | length 1
  Top Layer w0.102: 37.91,42.815 U1.J17@38.498,43.573
  other v1: 37.7,42.7
IN63: pad.0@41.6,44.4 U1.K16 | length 2.5
  Top Layer w0.102: U1.K16@39.05,43.925 v1@41.5,44.375
  other v1: 41.6,44.4
IN64: pad.0@53.5,44.4 U2.K2 | length 2.2
  Top Layer w0.102: v1@53.625,44.35 U2.K2@55.75,43.925
  other v1: 53.5,44.4
IN65: pad.0@57.1,43.2 U2.J1 | length 0.7
  Top Layer w0.102: U2.J1@56.324,43.495 v1@56.95,43.225
  other v1: 57.1,43.2
IN66: pad.0@52.8,44.4 U2.J2 | length 3
  Top Layer w0.102: v1@52.925,44.325 53.2,44.05 54,44.05 U2.J2@55.75,43.425
  other v1: 52.8,44.4
IN67: pad.0@57.1,42.6 U2.H1 | length 0.7
  Top Layer w0.102: U2.H1@56.374,42.963 v1@56.95,42.625
  other v1: 57.1,42.6
IN68: pad.0@53.5,43.7 U2.H2 | length 2.3
  Top Layer w0.102: v1@53.625,43.625 54.475,43.625 U2.H2@55.725,42.95
  other v1: 53.5,43.7
IN69: pad.0@57.1,42 U2.G1 | length 1
  Top Layer w0.102: U2.G1@56.349,42.405 v1@57.15,41.875
  other v1: 57.1,42
IN70: pad.0@52.8,43.7 U2.G2 | length 3.2
  Top Layer w0.102: v1@52.925,43.6 53.225,43.35 54.425,43.35 U2.G2@55.725,42.45
  other v1: 52.8,43.7
IN71: pad.0@57.1,41.4 U2.F1 | length 0.9
  Top Layer w0.102: U2.F1@56.399,42.022 v1@57.05,41.375
  other v1: 57.1,41.4
IN72: pad.0@53.5,43 U2.F2 | length 2.5
  Top Layer w0.102: v1@53.575,42.95 54.55,42.95 U2.F2@55.723,41.949
  other v1: 53.5,43
IN73: pad.0@57.1,40.8 U2.E1 | length 1
  Top Layer w0.102: U2.E1@56.349,41.515 v1@57.075,40.8
  other v1: 57.1,40.8
IN74: pad.0@52.8,43 U2.E2 | length 3.4
  Top Layer w0.102: v1@52.95,42.95 53.25,42.65 54.525,42.65 U2.E2@55.7,41.475
  other v1: 52.8,43
IN75: pad.0@57.1,40.2 U2.D1 | length 1.1
  Top Layer w0.102: U2.D1@56.349,41.006 v1@57.075,40.15
  other v1: 57.1,40.2
IN76: pad.0@53.5,42.3 U2.D2 | length 2.7
  Top Layer w0.102: v1@53.625,42.25 54.575,42.25 U2.D2@55.723,40.974
  other v1: 53.5,42.3
IN77: pad.0@57.1,39.6 U2.C1 | length 1.2
  Top Layer w0.102: U2.C1@56.349,40.523 v1@57.081,39.626
  other v1: 57.1,39.6
IN78: pad.0@52.8,42.3 U2.C2 | length 3.5
  Top Layer w0.102: v1@52.925,42.225 53.225,41.95 54.5,41.95 55.25,41.125 U2.C2@55.675,40.525
  other v1: 52.8,42.3
IN79: pad.0@57.7,38.9 U2.B1 | length 1.8
  Top Layer w0.102: U2.B1@56.375,40.015 56.875,39.25 57.3,39.25 v1@57.681,39.017
  other v1: 57.7,38.9
IN80: pad.0@57.1,38.9 U2.A1 | length 1.1
  Top Layer w0.102: U2.A1@56.3,39.5 v1@57.181,38.832
  other v1: 57.1,38.9
IN81: pad.0@54.9,40.9 U2.B2 | length 1
  Top Layer w0.102: v1@55,40.8 U2.B2@55.723,40.074
  other v1: 54.9,40.9
IN82: pad.0@56.5,38.9 U2.A2 | length 0.8
  Top Layer w0.102: U2.A2@55.8,39.475 v1@56.425,38.975
  other v1: 56.5,38.9
IN83: pad.0@54.2,41.6 U2.B3 | length 1.8
  Top Layer w0.102: v1@54.325,41.5 54.55,41.125 54.55,40.675 U2.B3@55.3,40.1
  other v1: 54.2,41.6
IN84: pad.0@55.9,38.9 U2.A3 | length 0.7
  Top Layer w0.102: U2.A3@55.325,39.475 v1@55.775,39
  other v1: 55.9,38.9
IN85: pad.0@54.2,40.9 U2.B4 | length 1
  Top Layer w0.102: v1@54.15,40.775 U2.B4@54.823,40.074
  other v1: 54.2,40.9
IN86: pad.0@55.3,38.9 U2.A4 | length 0.8
  Top Layer w0.102: U2.A4@54.825,39.475 v1@55.3,38.85
  other v1: 55.3,38.9
IN87: pad.0@53.5,40.9 U2.B5 | length 1
  Top Layer w0.102: v1@53.575,40.775 U2.B5@54.3,40.075
  other v1: 53.5,40.9
IN88: pad.0@54.7,38.9 U2.A5 | length 0.6
  Top Layer w0.102: U2.A5@54.3,39.5 v1@54.65,39
  other v1: 54.7,38.9
IN89: pad.0@53.5,41.6 U2.B6 | length 1.9
  Top Layer w0.102: v1@53.55,41.525 53.15,41.15 53.15,40.65 U2.B6@53.823,40.074
  other v1: 53.5,41.6
IN90: pad.0@54.1,38.9 U2.A6 | length 0.6
  Top Layer w0.102: U2.A6@53.809,39.507 v1@54.075,39
  other v1: 54.1,38.9
IN91: pad.0@52.8,40.9 U2.B7 | length 0.9
  Top Layer w0.102: v1@52.825,40.775 U2.B7@53.302,40.066
  other v1: 52.8,40.9
IN92: pad.0@53.5,38.9 U2.A7 | length 0.5
  Top Layer w0.102: U2.A7@53.301,39.482 v1@53.5,39
  other v1: 53.5,38.9
IN93: pad.0@52.8,41.6 U2.B8 | length 1.7
  Top Layer w0.102: v1@52.8,41.475 52.45,41.125 52.45,40.625 U2.B8@52.819,40.065
  other v1: 52.8,41.6
IN94: pad.0@52.9,38.9 U2.A8 | length 0.5
  Top Layer w0.102: U2.A8@52.818,39.482 v1@52.925,39
  other v1: 52.9,38.9
IN95: pad.0@52.1,40.9 U2.B9 | length 0.8
  Top Layer w0.102: v1@52.125,40.775 U2.B9@52.312,40.015
  other v1: 52.1,40.9
IN96: pad.0@52.3,38.9 U2.A9 | length 0.6
  Top Layer w0.102: v1@52.3,38.975 U2.A9@52.311,39.532
  other v1: 52.3,38.9
IN97: pad.0@51.7,38.9 U2.A10 | length 0.6
  Top Layer w0.102: v1@51.675,38.925 U2.A10@51.842,39.517
  other v1: 51.7,38.9